# Altium PCB OVP_OIP_12V.PcbDoc
Units mil, origin at the board's own origin, x right, y up, seen from the top; angles counter-clockwise.
Board outline 1375 x 425 mil, 2 copper layers (Top Layer, Bottom Layer); 5 components, 3 nets, 12 pads, 2 vias.
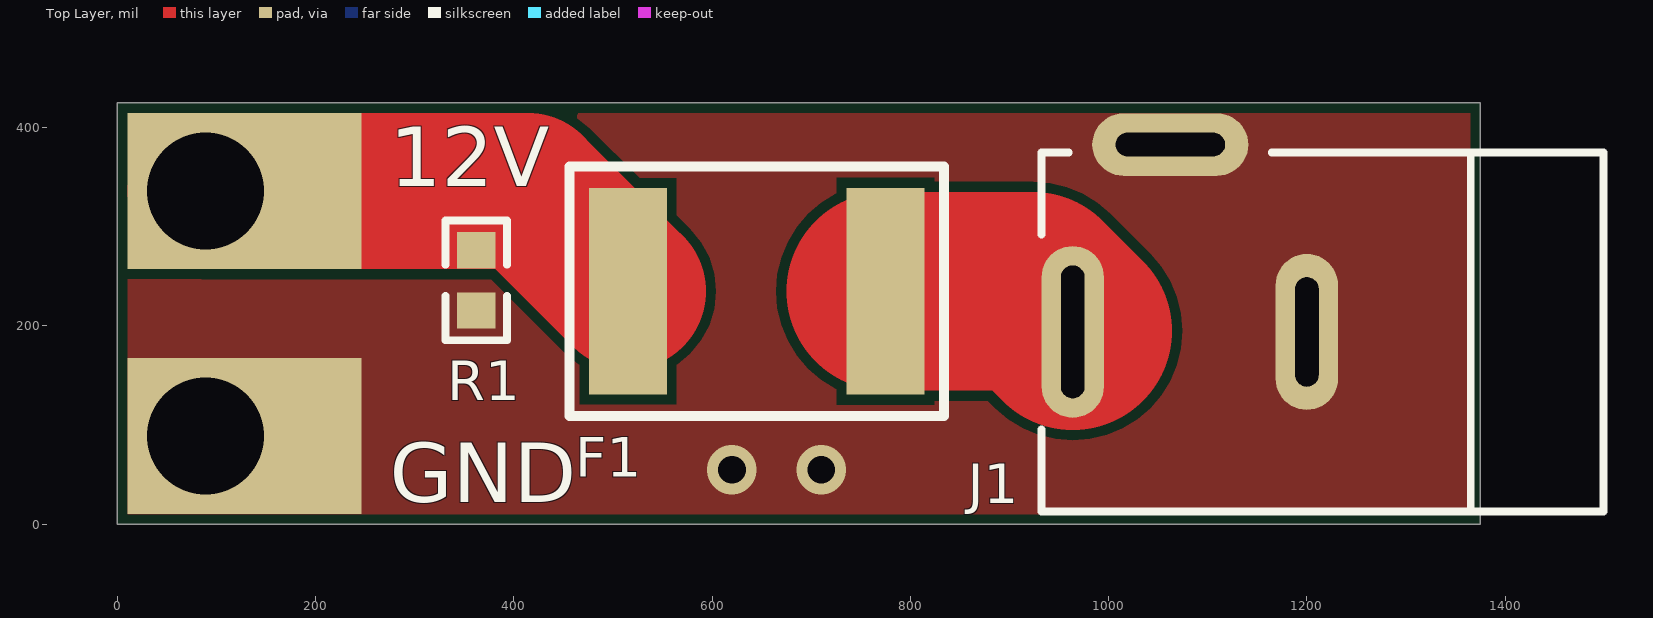
[diagram p0: Top Layer view]
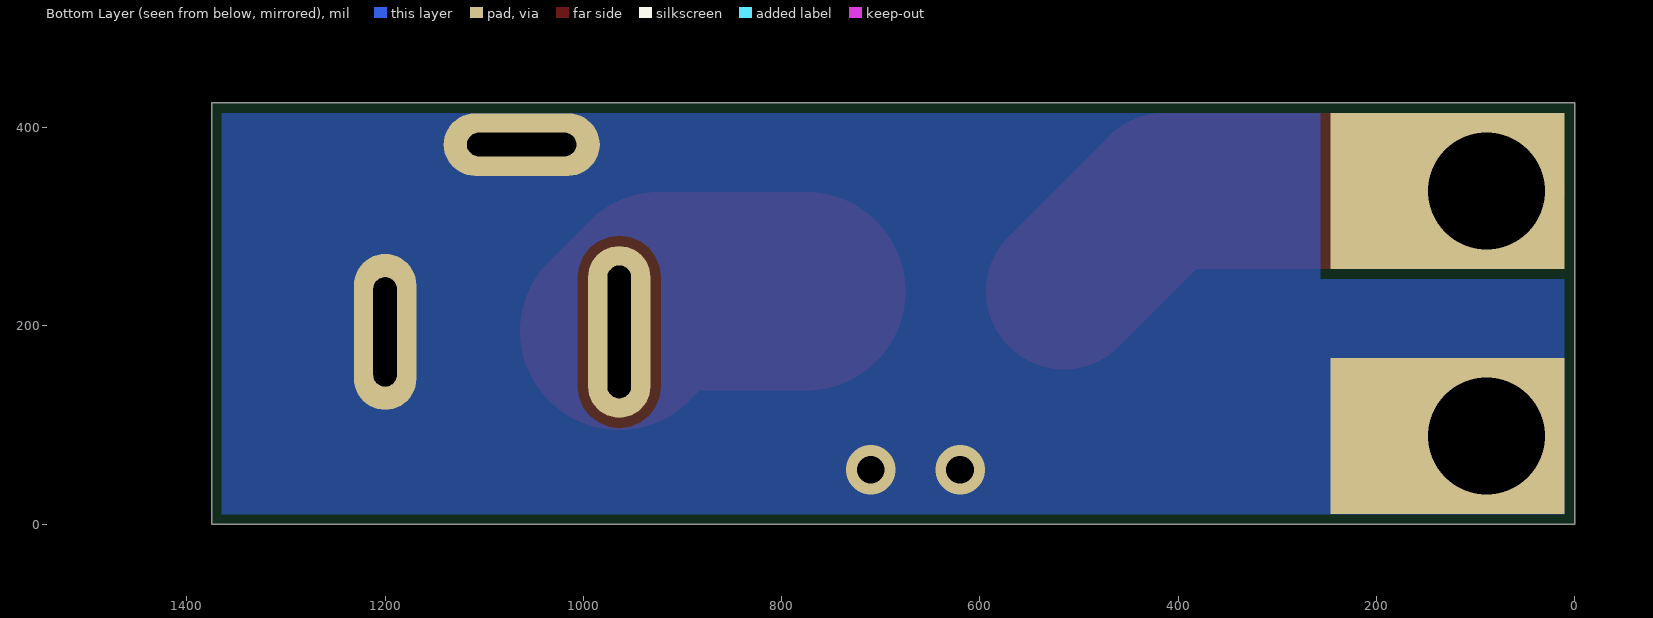
[diagram p1: Bottom Layer view, seen from below]

## Layer stack, top to bottom
Top Solder: solder mask 0.4, Solder Resist, Dk 3.5
Top Layer: signal copper 1.4
Dielectric 1: dielectric 12.6, FR-4, Dk 4.8
Bottom Layer: signal copper 1.4
Bottom Solder: solder mask 0.4, Solder Resist, Dk 3.5

## Board outline
0,0 1375,0 1375,425 0,425

## Design rules (kind name [scope] priority, off if disabled: settings)
BoardOutlineClearance [All] p1: gap=10 ignorepadtopadclearanceinfootprint=FALSE except(0: Arc-SplitContinuation Track-OutlineEdge Track-SplitContinuation SMDPad-SplitContinuation THPad-SplitContinuation Via-SplitContinuation Fill-SplitContinuation Poly-SplitContinuation Region-SplitContinuation Text-SplitContinuation)
Clearance [All] p1: gap=10 ignorepadtopadclearanceinfootprint=TRUE except(0: Arc-Hole Track-Hole SMDPad-Hole THPad-Hole Via-Hole Fill-Hole Poly-Hole Region-Hole Text-Hole)
HoleSize [All] p1: absolutevalues=TRUE maxlimit=200 minlimit=1 maxpercent=80.000 minpercent=20.000
PolygonConnect [All] p1: connectstyle=Direct reliefconductorwidth=10 reliefentries=4 polygonreliefangle="90 Angle" airgapwidth=10
RoutingVias [All] p1: holewidth=28 width=50 viastyle="Through Hole" minholewidth=28 minwidth=50 maxholewidth=28 maxwidth=50
SilkToSolderMaskClearance SilkToSolderMaskClearance_1 [HasFootprint('0603_R')] p1: minsilkscreentomaskgap=3 clearancetoexposedcopper=TRUE
SilkToSolderMaskClearance [All] p2: minsilkscreentomaskgap=10 clearancetoexposedcopper=TRUE
SolderMaskExpansion [All] p1: expansion=4
Width [All] p1: maxlimit=200 minlimit=10 preferedwidth=10
28 further rules are at their usual default settings.

## Components (designator, comment, footprint, x,y, rotation, side; value= is the part's Value field where it differs from the comment)
12V "SMDHDRX1" SMDHDRX1_6*4#1 70,325 r0 top
F1 "PTC 5A 16V" 2920 645,235 r0 top
GND "SMDHDRX1" SMDHDRX1_6*4#2 65,90 r0 top
J1 "PWR2.5" DC005F 1215.75,194 r180 top
R1 "RL0603E012M100K" 0603_R 362,246 r90 top

## Footprints (in the part's own frame and the unit in brackets; to place one, negate y for a bottom-side part, rotate by r counter-clockwise, add the part's x,y. Pads: shape width x height; smd on the part's side, far side on the other; paste and mask are expansions set on the pad)
0603_R [mm]
  rect 0.93x0.98 smd: 1(-0.77,0) 2(0.77,0)
  silkscreen extent -1.53,-0.79 1.54,0.79, body extent -0.85,-0.4 0.85,0.4, height 0.56
2920 [mm]
  rect 2x5.3 smd: 1(-3.3,0) 2(3.3,0)
  silkscreen extent -4.8,-3.2 4.8,3.2
DC005F [mm]
  oval 1.6x4.4 hole 0.6 slot 3.4 at 90 deg: 1(6.4,0)
  oval 1.6x4 hole 0.6 slot 2.8 at 90 deg: 2(0.4,0)
  oval 4x1.6 hole 0.6 slot 2.8 at 0 deg: 3(3.9,-4.8)
  rrect50% 0.4x2 on Mech13: ""(0.4,0)
  rrect50% 2x0.4 on Mech13: ""(3.9,-4.8)
  rrect50% 0.4x3 on Mech13: ""(6.4,0)
  silkscreen extent -7.2,-4.6 7.2,4.6
SMDHDRX1_6*4#1 [mm] "SMD and Hole"
  rect 6x4 hole 3 copper offset 1,0: 1(0.483,0.279)
SMDHDRX1_6*4#2 [mm] "SMD and Hole"
  rect 6x4 hole 3 copper offset 1,0: 1(0.61,-0.025)

## Part data
12V GND: "SMA and Hole"
F1: library part "Fuse 1", "Fuse", LatestRevisionDate=17-Jul-2002, LatestRevisionNote="Re-released for DXP Platform.", PackageDescription="Thru-Hole; 2 Leads", PackageReference=PIN-W2/E2.8, Published=8-Jun-2000, Publisher="Altium Limited"
R1: library part "Res Varistor", "Varistor (Voltage-Sensitive Resistor)", Code_IPC=RESC2012, LatestRevisionDate=29-May-2009, LatestRevisionNote="IPC-7351 Footprint Added.", PackageDescription="Chip Resistor 0805 Case Size", PackageReference=6-0805, PackageVersion=Mar-2003, Published=24-Mar-1999, Publisher="Altium Limited"

## Via types
v1: diameter 50, hole 28, Top Layer to Bottom Layer, 2 vias

## Nets (pads, with @x,y where several pads share a name; then routed paths per layer and width w, separated by ;. In a path a pad name is that pad's centre, name@x,y a point inside that pad or via, vN(x,y) a via of type N, cw(c..) or ccw(c..) an arc to the next point about the centre after c; other vN are vias at no path point)
+12: F1.2 J1.1 | length 205.4
  Top Layer w200: F1.2 923.78,235 J1.1@963.78,195
GND: GND.1 J1.2 J1.3 R1.1
  other v1: 620,55 710,55
Net12V_1: 12V.1 F1.1 R1.2 | length 467.9
  Top Layer w157.48: 12V.1 414.08,336 F1.1
pads on no net: J1.

## Polygon pours and split planes (outlines as drawn)
GND on Top Layer "GND_L01_P002" (solid, remove dead copper, pour order 2): 0,0 1375,0 1375,425 0,425
GND on Bottom Layer "GND_L02_P003" (solid, remove dead copper, pour order 3): 0,0 1375,0 1375,425 0,425

## Silkscreen, mask and mechanical layers (free items; w line width, h text height)
Mechanical 1:
  lines w10: 0,0 0,10 0,425 1375,425 1375,0 0,0